# Altium PCB PCB1.PcbDoc
Units mm, origin at the board's own origin, x right, y up, seen from the top; angles counter-clockwise.
Board outline 55 x 60 mm, 4 copper layers (Top Layer, Layer 1, Layer 2, Bottom Layer), stack 1.448 mm thick; 5 components, 20 nets, 80 pads, 2 vias.
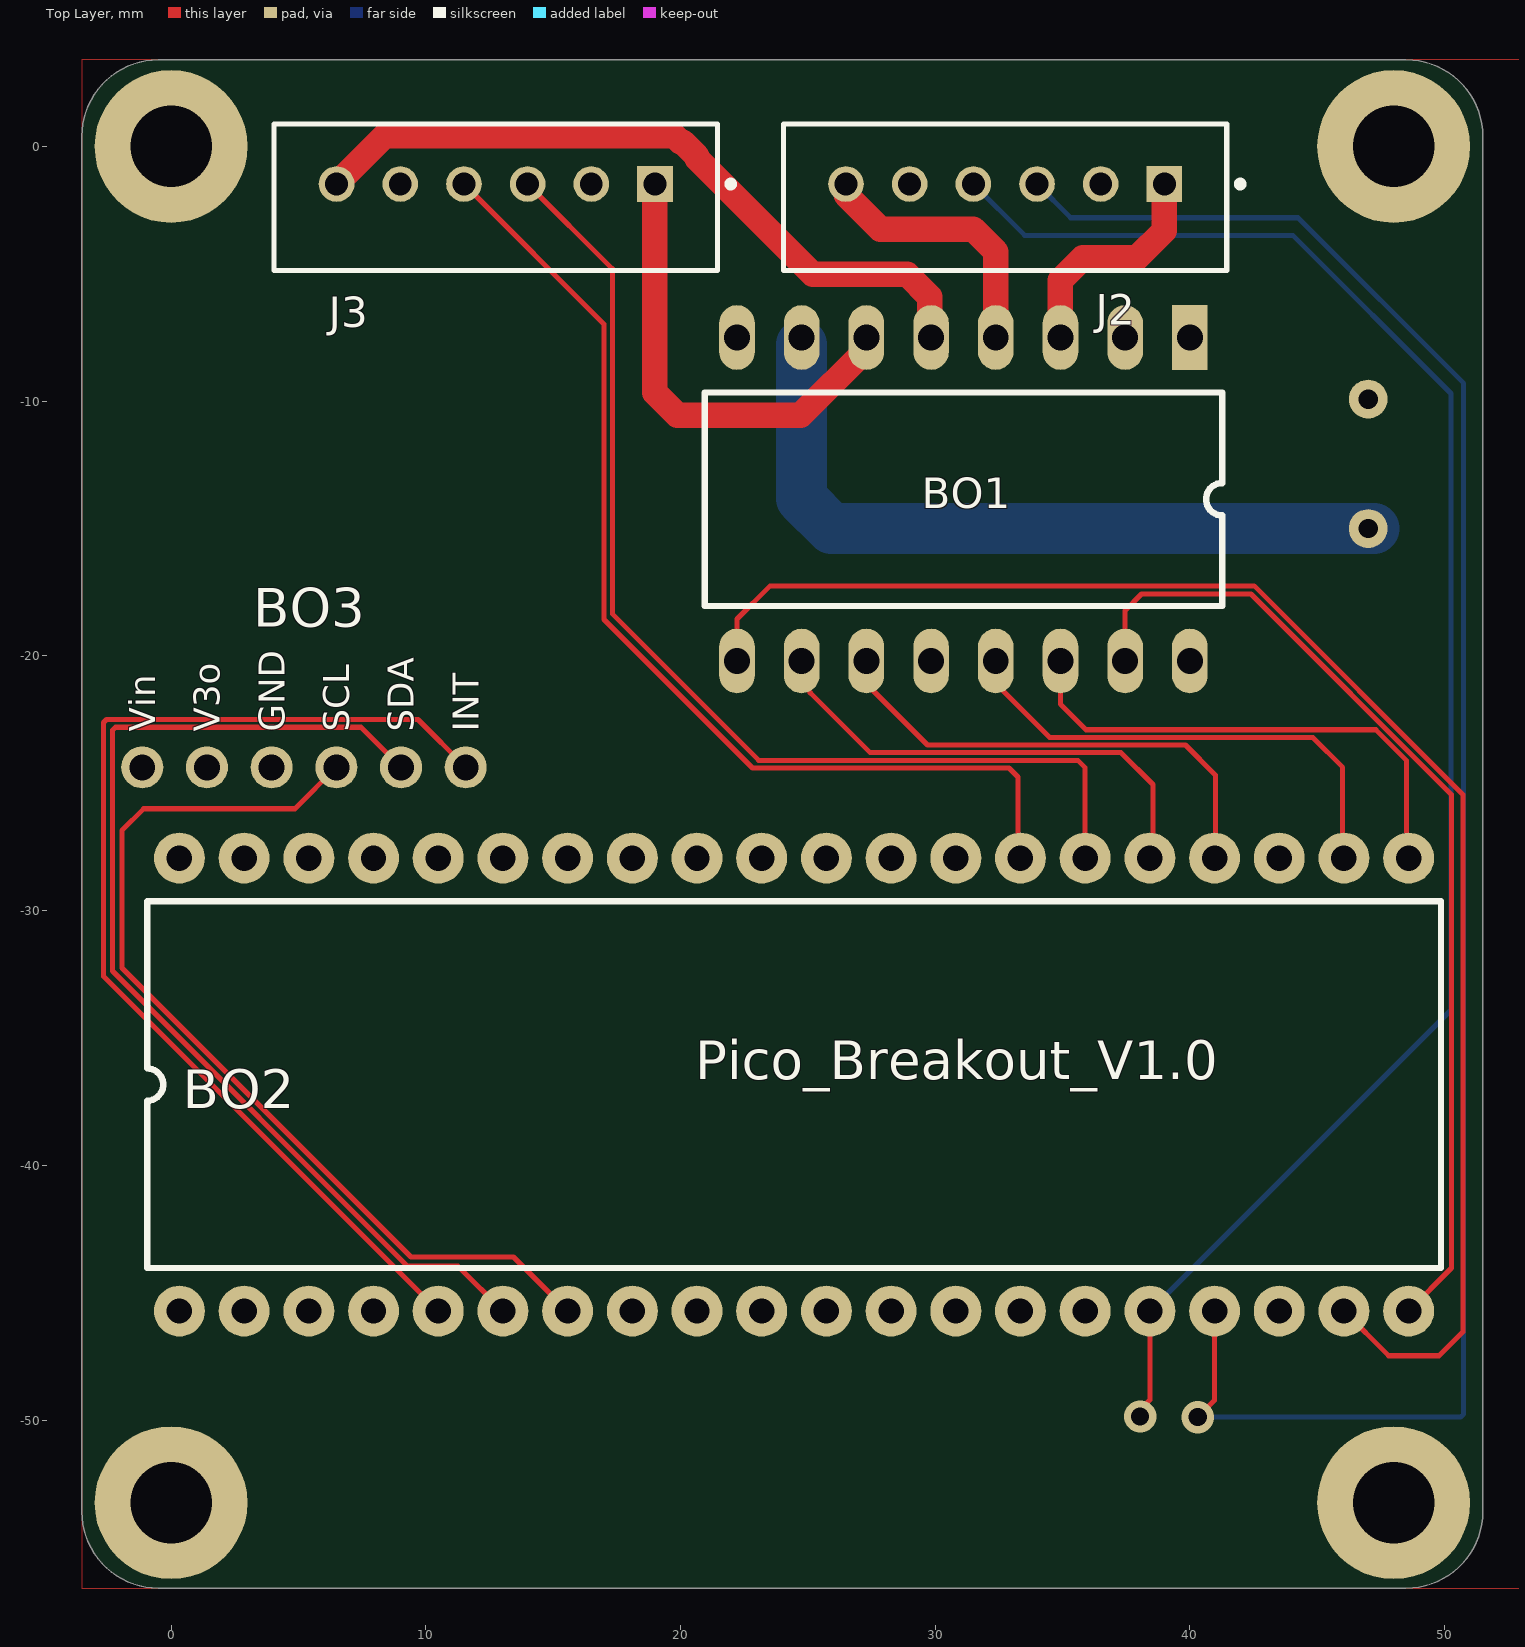
[diagram p0: Top Layer view]
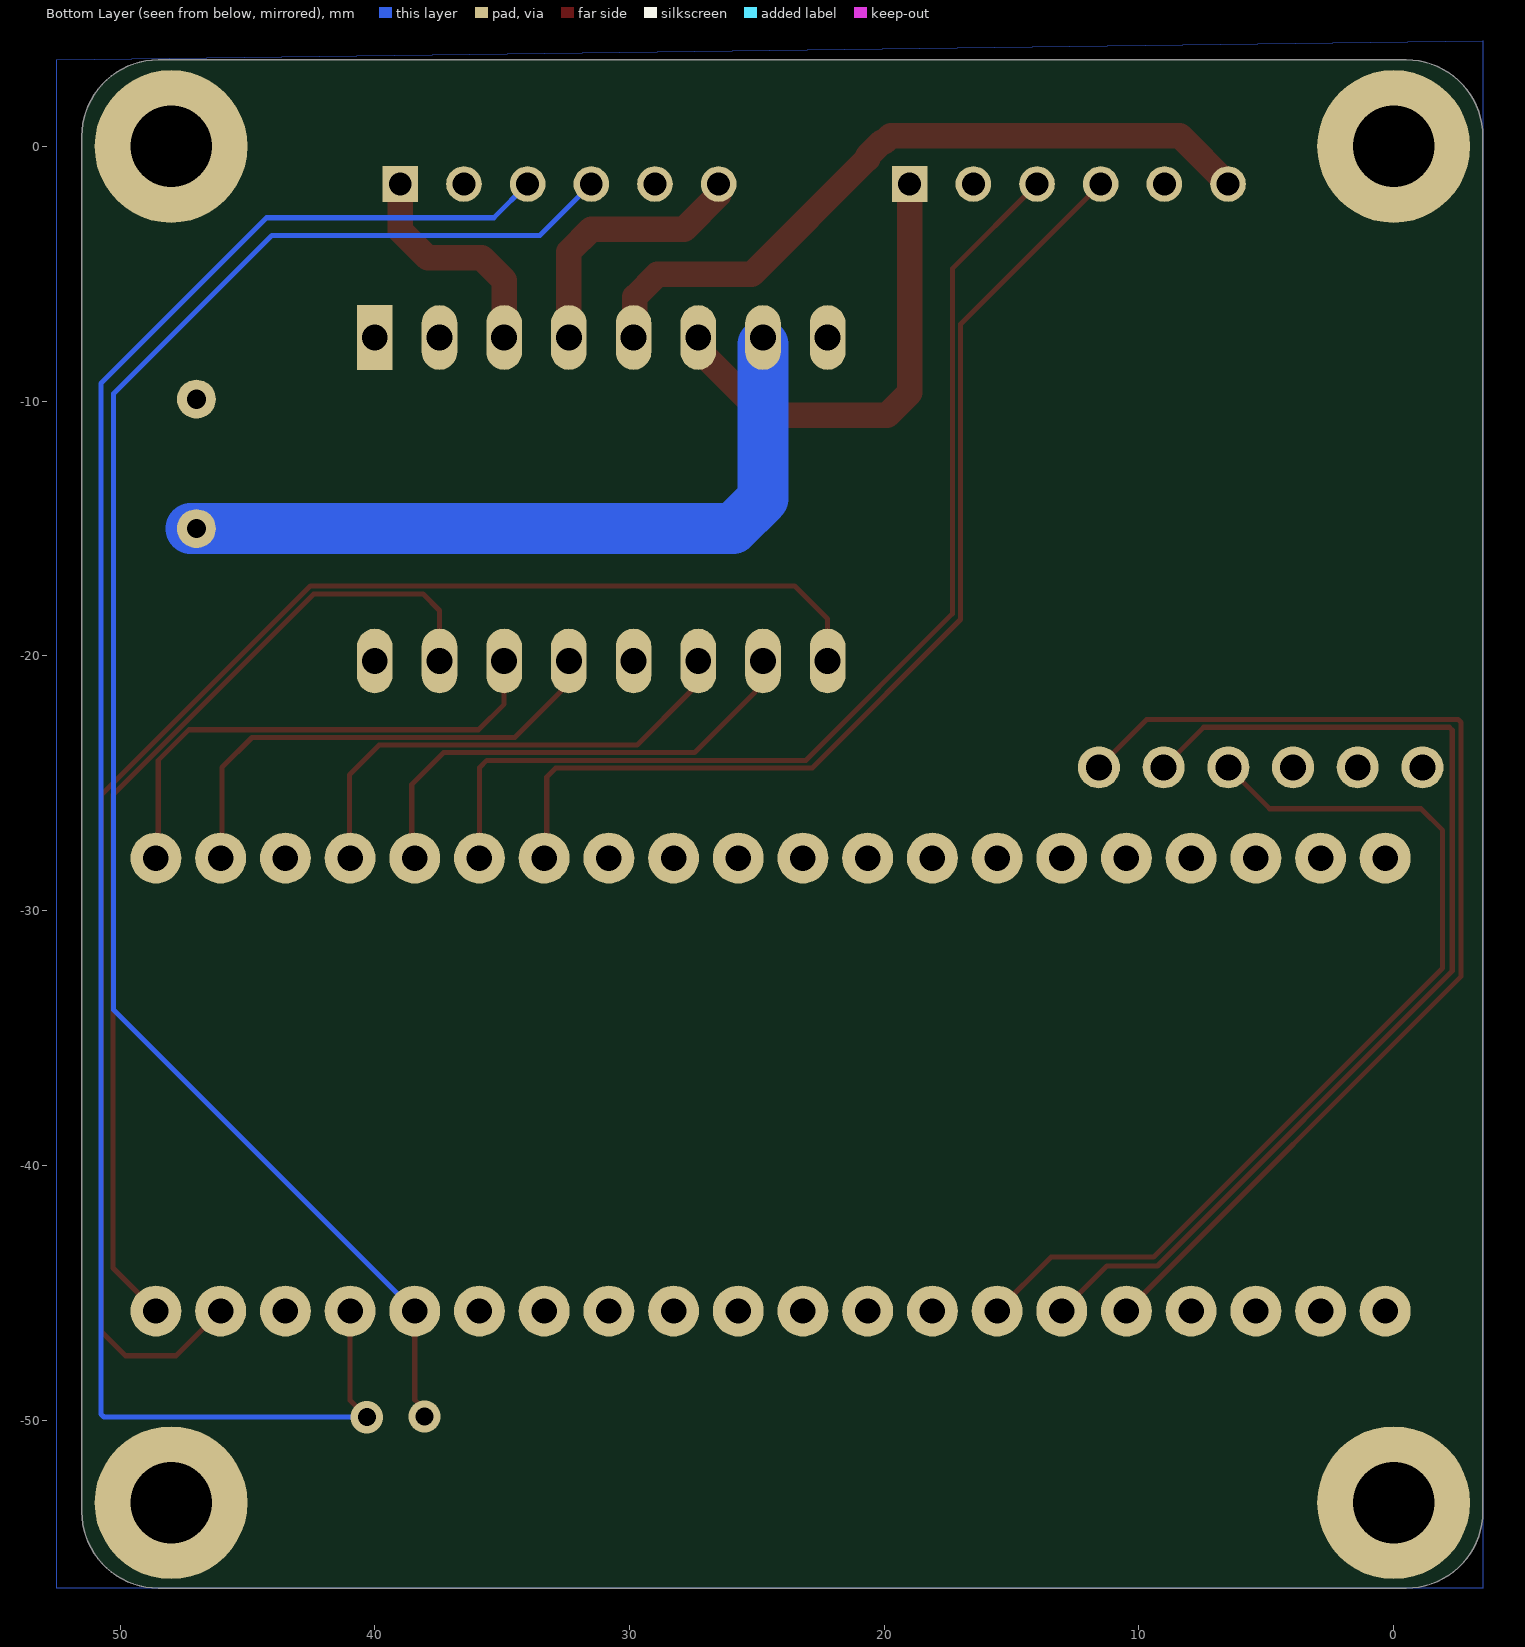
[diagram p1: Bottom Layer view, seen from below]

## Layer stack, top to bottom
Top Solder: solder mask 0.0102, Solder Resist, Dk 3.5
Top Layer: signal copper 0.0356
Dielectric 2: prepreg 0.0711, PP-006, Dk 4.1
Layer 1: signal copper 0.0175
Dielectric 1: dielectric 1.2, FR-4, Dk 4.8
Layer 2: signal copper 0.0175
Dielectric 3: prepreg 0.0711, PP-006, Dk 4.1
Bottom Layer: signal copper 0.0356
Bottom Solder: solder mask 0.0102, Solder Resist, Dk 3.5

## Board outline
-3.5,-53.6 -3.5,0.4 cw(c-0.5,0.4) -0.5,3.4 48.5,3.4 cw(c48.5,0.4) 51.5,0.4 51.5,-53.6 cw(c48.5,-53.6) 48.5,-56.6 -0.5,-56.6 cw(c-0.5,-53.6)

## Design rules (kind name [scope] priority, off if disabled: settings)
AssemblyTestPointUsage [All] p0: scope1count=1 scope1_0_kind=Board scope1_0_value=Board scope2count=1 scope2_0_kind=Board scope2_0_value=Board commentlength=0
AssemblyTestpoint [All] p0: scope1count=1 scope1_0_kind=Board scope1_0_value=Board scope2count=1 scope2_0_kind=Board scope2_0_value=Board commentlength=0
BoardOutlineClearance [All] p0: scope1count=1 scope1_0_kind=Board scope1_0_value=Board scope2count=1 scope2_0_kind=Board scope2_0_value=Board commentlength=0 gap=0.2
BoardOutlineClearance [All] p1: gap=0.2 ignorepadtopadclearanceinfootprint=FALSE
Clearance [All] p0: scope1count=1 scope1_0_kind=Board scope1_0_value=Board scope2count=1 scope2_0_kind=Board scope2_0_value=Board commentlength=0 gap=0.2
Clearance [All] p1: gap=0.2 ignorepadtopadclearanceinfootprint=TRUE except(0: Arc-Text Arc-Hole Track-Text Track-Hole SMDPad-Text SMDPad-Hole THPad-Text THPad-Hole Via-Text Via-Hole Fill-Text Fill-Hole Poly-Text Poly-Hole Region-Text Region-Hole Text-Text Text-Hole; 0.1: Arc-Arc Arc-Track Track-Track)
ComponentClearance [All] p0: scope1count=1 scope1_0_kind=Board scope1_0_value=Board scope2count=1 scope2_0_kind=Board scope2_0_value=Board commentlength=0 gap=0.254 collisioncheckmode=3
DiffPairsRouting [All] p0: scope1count=1 scope1_0_kind=Board scope1_0_value=Board scope2count=1 scope2_0_kind=Board scope2_0_value=Board commentlength=0
FabricationTestPointUsage [All] p0: scope1count=1 scope1_0_kind=Board scope1_0_value=Board scope2count=1 scope2_0_kind=Board scope2_0_value=Board commentlength=0 valid=0 allowmultiple=FALSE
FabricationTestpoint [All] p0: scope1count=1 scope1_0_kind=Board scope1_0_value=Board scope2count=1 scope2_0_kind=Board scope2_0_value=Board commentlength=0 side=3 testpointundercomponent=TRUE minsize=1.016 maxsize=2.54 preferedsize=1.524 minholesize=0 maxholesize=1.016 preferedholesize=0.813 testpointgrid=0.025
FanoutControl Fanout_Default [All] p0: scope1count=1 scope1_0_kind=Board scope1_0_value=Board scope2count=1 scope2_0_kind=Board scope2_0_value=Board commentlength=30 // Fanout_Default (Default Rule)
FanoutControl Fanout_Small [All] p0 off: scope1count=1 scope1_0_kind=Board scope1_0_value=Board scope2count=1 scope2_0_kind=Board scope2_0_value=Board commentlength=84 // Protel DXP Scope 1 Expression Was: (CompPinCount < 5)   Fanout_Small (Default Rule)
FanoutControl Fanout_SOIC [All] p0 off: scope1count=1 scope1_0_kind=Board scope1_0_value=Board scope2count=1 scope2_0_kind=Board scope2_0_value=Board commentlength=71 // Protel DXP Scope 1 Expression Was: IsSOIC   Fanout_SOIC (Default Rule)
FanoutControl Fanout_LCC [All] p0 off: scope1count=1 scope1_0_kind=Board scope1_0_value=Board scope2count=1 scope2_0_kind=Board scope2_0_value=Board commentlength=69 // Protel DXP Scope 1 Expression Was: IsLCC   Fanout_LCC (Default Rule)
FanoutControl Fanout_BGA [All] p0 off: scope1count=1 scope1_0_kind=Board scope1_0_value=Board scope2count=1 scope2_0_kind=Board scope2_0_value=Board commentlength=69 // Protel DXP Scope 1 Expression Was: IsBGA   Fanout_BGA (Default Rule)
Height [All] p0: scope1count=1 scope1_0_kind=Board scope1_0_value=Board scope2count=1 scope2_0_kind=Board scope2_0_value=Board commentlength=0
HoleSize [All] p0: scope1count=1 scope1_0_kind=Board scope1_0_value=Board scope2count=1 scope2_0_kind=Board scope2_0_value=Board commentlength=0 absolutevalues=TRUE maxlimit=6.3 minlimit=0.3 maxpercent=80.000 minpercent=20.000
HoleSize [All] p1: absolutevalues=TRUE maxlimit=6.3 minlimit=0.3 maxpercent=80.000 minpercent=20.000
HoleToHoleClearance [All] p0: scope1count=1 scope1_0_kind=Board scope1_0_value=Board scope2count=1 scope2_0_kind=Board scope2_0_value=Board commentlength=0
LayerPairs [All] p0: scope1count=1 scope1_0_kind=Board scope1_0_value=Board scope2count=1 scope2_0_kind=Board scope2_0_value=Board commentlength=0 enforce=TRUE
MinimumAnnularRing [All] p0: scope1count=1 scope1_0_kind=Board scope1_0_value=Board scope2count=1 scope2_0_kind=Board scope2_0_value=Board commentlength=0 minimumring=0.13
MinimumAnnularRing [All] p1: minimumring=0.13
MinimumSolderMaskSliver [All] p0: scope1count=1 scope1_0_kind=Board scope1_0_value=Board scope2count=1 scope2_0_kind=Board scope2_0_value=Board commentlength=0
MinimumSolderMaskSliver [All] p1: minsoldermaskwidth=0.098
NetAntennae [All] p0: scope1count=1 scope1_0_kind=Board scope1_0_value=Board scope2count=1 scope2_0_kind=Board scope2_0_value=Board commentlength=0
PasteMaskExpansion [All] p0: scope1count=1 scope1_0_kind=Board scope1_0_value=Board scope2count=1 scope2_0_kind=Board scope2_0_value=Board commentlength=0 expansion=0
PlaneClearance [All] p0: scope1count=1 scope1_0_kind=Board scope1_0_value=Board scope2count=1 scope2_0_kind=Board scope2_0_value=Board commentlength=0 clearance=0.508
PlaneConnect [All] p0: scope1count=1 scope1_0_kind=Board scope1_0_value=Board scope2count=1 scope2_0_kind=Board scope2_0_value=Board commentlength=0 planeconnectstyle=Relief reliefexpansion=0.508 reliefentries=4 reliefconductorwidth=0.254 reliefairgap=0.254
PolygonConnect [All] p0: scope1count=1 scope1_0_kind=Board scope1_0_value=Board scope2count=1 scope2_0_kind=Board scope2_0_value=Board commentlength=0 connectstyle=Relief reliefconductorwidth=0.3 reliefentries=4 polygonreliefangle="90 Angle"
PolygonConnect "PTH-M3 Connect" [All] p0: scope1count=1 scope1_0_kind=Board scope1_0_value=Board scope2count=1 scope2_0_kind=Footprint scope2_0_value=PTH-M3 commentlength=0 connectstyle=Direct reliefconductorwidth=0.254 reliefentries=4 polygonreliefangle="90 Angle"
PolygonConnect "PTH-M3 Connect" [All vs HasFootprint('PTH-M3')] p1: connectstyle=Direct reliefconductorwidth=0.254 reliefentries=4 polygonreliefangle="90 Angle" airgapwidth=0.254
PolygonConnect [All] p2: thpad.connectstyle=Relief thpad.reliefconductorwidth=0.3 thpad.reliefentries=4 thpad.polygonreliefangle="90 Angle" thpad.airgapwidth=0.1 smdpad.connectstyle=Relief smdpad.reliefconductorwidth=0.3 smdpad.reliefentries=4 smdpad.polygonreliefangle="90 Angle" smdpad.airgapwidth=0.1 via.connectstyle=Direct via.reliefconductorwidth=0.254 via.reliefentries=4 via.polygonreliefangle="90 Angle" via.airgapwidth=0.254
RoomDefinition Schemeatic_1_0 [All] p0: scope1count=1 scope1_0_kind=ComponentClass scope1_0_value=Schemeatic_1_0 scope2count=1 scope2_0_kind=Board scope2_0_value=Board commentlength=0 region_x1=0 region_y1=0 region_x2=20000000 region_y2=10000000 confinementstyle=ConfineOut
RoomDefinition Schemeatic_1_0 [InComponentClass('Schemeatic_1_0')] p1: confinementstyle=ConfineOut formatcopy=TRUE lockcomponents=FALSE outline -99.949,-99.949 -49.149,-99.949 -49.149,-74.549 -99.949,-74.549
RoutingCorners [All] p0: scope1count=1 scope1_0_kind=Board scope1_0_value=Board scope2count=1 scope2_0_kind=Board scope2_0_value=Board commentlength=0 cornerstyle=45-Degree minsetback=2.54 maxsetback=2.54
RoutingLayers [All] p0: scope1count=1 scope1_0_kind=Board scope1_0_value=Board scope2count=1 scope2_0_kind=Board scope2_0_value=Board commentlength=0 top layer=Automatic mid layer 1=Automatic mid layer 2=Automatic bottom layer=Automatic
RoutingPriority [All] p0: scope1count=1 scope1_0_kind=Board scope1_0_value=Board scope2count=1 scope2_0_kind=Board scope2_0_value=Board commentlength=0
RoutingTopology [All] p0: scope1count=1 scope1_0_kind=Board scope1_0_value=Board scope2count=1 scope2_0_kind=Board scope2_0_value=Board commentlength=0 topology=Shortest
RoutingVias [All] p0: scope1count=1 scope1_0_kind=Board scope1_0_value=Board scope2count=1 scope2_0_kind=Board scope2_0_value=Board commentlength=0 holewidth=0.3 width=0.6 viastyle="Through Hole" minholewidth=0.3 minwidth=0.45 maxholewidth=6.35 maxwidth=3
RoutingVias [All] p1: holewidth=0.3 width=0.6 viastyle="Through Hole" minholewidth=0.3 minwidth=0.45 maxholewidth=6.35 maxwidth=3
ShortCircuit [All] p0: scope1count=1 scope1_0_kind=Board scope1_0_value=Board scope2count=1 scope2_0_kind=Board scope2_0_value=Board commentlength=0 allowed=FALSE
SilkToBoardRegionClearance [All] p0: scope1count=1 scope1_0_kind=Board scope1_0_value=Board scope2count=1 scope2_0_kind=Board scope2_0_value=Board commentlength=0
SilkToSilkClearance [All] p0: scope1count=1 scope1_0_kind=Board scope1_0_value=Board scope2count=1 scope2_0_kind=Board scope2_0_value=Board commentlength=0
SilkToSilkClearance [All] p1: silktosilkclearance=0.1
SilkToSolderMaskClearance [All] p0 off: scope1count=1 scope1_0_kind=Board scope1_0_value=Board scope2count=1 scope2_0_kind=Board scope2_0_value=Board commentlength=44 // Protel DXP Scope 1 Expression Was: IsPad
SilkToSolderMaskClearance [IsPad] p1: minsilkscreentomaskgap=0 clearancetoexposedcopper=TRUE
SolderMaskExpansion [All] p0: scope1count=1 scope1_0_kind=Board scope1_0_value=Board scope2count=1 scope2_0_kind=Board scope2_0_value=Board commentlength=0 expansion=0.038
SolderMaskExpansion "Tent Vias" [All] p0 off: scope1count=1 scope1_0_kind=Board scope1_0_value=Board scope2count=1 scope2_0_kind=Board scope2_0_value=Board commentlength=44 expansion=0.102 // Protel DXP Scope 1 Expression Was: IsVia
SolderMaskExpansion "Tent Vias" [IsVia] p1: expansion=0.102 istentingtop=TRUE
SolderMaskExpansion [All] p2: expansion=0.038 istentingtop=FALSE
UnRoutedNet [All] p0: scope1count=1 scope1_0_kind=Board scope1_0_value=Board scope2count=1 scope2_0_kind=Board scope2_0_value=Board commentlength=0
UnpouredPolygon [All] p0: scope1count=1 scope1_0_kind=Board scope1_0_value=Board scope2count=1 scope2_0_kind=Board scope2_0_value=Board commentlength=0
Width [All] p0: scope1count=1 scope1_0_kind=Board scope1_0_value=Board scope2count=1 scope2_0_kind=Board scope2_0_value=Board commentlength=0 maxlimit=2 minlimit=0.1 preferedwidth=0.2
Width PowerNets [All] p0: scope1count=1 scope1_0_kind=NetClass scope1_0_value=PowerNets scope2count=1 scope2_0_kind=Board scope2_0_value=Board commentlength=0 maxlimit=0.5 minlimit=0.2 preferedwidth=0.2
Width PowerNets [InNetClass('PowerNets')] p1: maxlimit=0.5 minlimit=0.2 preferedwidth=0.2 minimp=50.000000 maximp=50.000000 favimp=50.000000
Width [All] p2: maxlimit=2 minlimit=0.1 preferedwidth=0.2 minimp=50.000000 maximp=50.000000 favimp=50.000000
26 further rules are at their usual default settings.

## Components (designator, comment, footprint, x,y, rotation, side; value= is the part's Value field where it differs from the comment)
BO1 "" "DIP16 - duplicate1" 40,-7.5 r270 top
BO2 "Pico Custom" DIP40 0.33,-45.72 r90 top
BO3 "I2C breakout for MPU6050" PCBComponent_1 -1.13,-24.375 r90 top
J2 "B6B-XH-A(LF)(SN)" FP-B6B-XH-A_LF_SN-MFG 32.75,-2 r180 top
J3 "B6B-XH-A(LF)(SN)" FP-B6B-XH-A_LF_SN-MFG 12.75,-2 r180 top

## Footprints (in the part's own frame and the unit in brackets; to place one, negate y for a bottom-side part, rotate by r counter-clockwise, add the part's x,y. Pads: shape width x height; smd on the part's side, far side on the other; paste and mask are expansions set on the pad)
"DIP16 - duplicate1" [mil]
  rect 100x55 hole 40: 1(0,0)
  oval 100x55 hole 40: 2(0,-100) 3(0,-200) 4(0,-300) 5(0,-400) 6(0,-500) 7(0,-600) 8(0,-700) 9(500,-700) 10(500,-600) 11(500,-500) 12(500,-400) 13(500,-300) 14(500,-200) 15(500,-100) 16(500,0)
  silkscreen extent 85,-750 415,50
DIP40 [mm]
  round 2 hole 1: 1(0,0) 2(0,-2.54) 3(0,-5.08) 4(0,-7.62) 5(0,-10.16) 6(0,-12.7) 7(0,-15.24) 8(0,-17.78) 9(0,-20.32) 10(0,-22.86) 11(0,-25.4) 12(0,-27.94) 13(0,-30.48) 14(0,-33.02) 15(0,-35.56) 16(0,-38.1) 17(0,-40.64) 18(0,-43.18) 19(0,-45.72) 20(0,-48.26) 21(17.78,-48.26) 22(17.78,-45.72) 23(17.78,-43.18) 24(17.78,-40.64) 25(17.78,-38.1) 26(17.78,-35.56) 27(17.78,-33.02) 28(17.78,-30.48) 29(17.78,-27.94) 30(17.78,-25.4) 31(17.78,-22.86) 32(17.78,-20.32) 33(17.78,-17.78) 34(17.78,-15.24) 35(17.78,-12.7) 36(17.78,-10.16) 37(17.78,-7.62) 38(17.78,-5.08) 39(17.78,-2.54) 40(17.78,0)
  silkscreen extent 1.69,-49.53 16.09,1.27
FP-B6B-XH-A_LF_SN-MFG [mm]
  rect 1.4x1.4 hole 0.9 paste-1000 mask+0: 1(-6.25,-0.525)
  round 1.4 hole 0.9 paste-1000 mask+0: 2(-3.75,-0.525) 3(-1.25,-0.525) 4(1.25,-0.525) 5(3.75,-0.525) 6(6.25,-0.525)
  silkscreen extent -9.35,-2.88 8.7,2.88
PCBComponent_1 [mil]
  round 65 hole 40: 0(0,0) 1(0,-100) 2(0,-200) 3(0,-300) 4(0,-400) 5(0,-500)

## Part data
BO1: library part TB6612FNG_Breakout
BO2: library part PIco_custom_BO
BO3: library part MPU_6050_IMU_I2C
J2 J3: library part CMP-17439-000076-1, "CONN HEADER VERT 6POS 2.5MM"

## Free pads (board coordinates)
  round 1.524 hole 0.762: 2(47,-15) 3(47,-9.92)
  round 6 hole 3.2: 8(0,-53.25) 11(48,-53.25) 12(48,0) 13(0,0)

## Via types
v1: diameter 1.27, hole 0.711, Top Layer to Bottom Layer, tented both sides, 2 vias

## Nets (pads, with @x,y where several pads share a name; then routed paths per layer and width w, separated by ;. In a path a pad name is that pad's centre, name@x,y a point inside that pad or via, vN(x,y) a via of type N, cw(c..) or ccw(c..) an arc to the next point about the centre after c; other vN are vias at no path point)
+5V: BO1.2 BO1.12 BO2.36 BO3.0 J2.5 J3.5 pad.3
+12: BO1.7 pad.2 | length 29
  Bottom Layer w2: BO1.7@24.76,-7.77 24.76,-13.828 25.932,-15 pad.2@47.225,-15
A01: BO1.3 J2.1 | length 9
  Top Layer w1: BO1.3 34.92,-5.251 35.799,-4.372 37.928,-4.372 39,-3.3 J2.1
A02: BO1.4 J2.6 | length 10.6
  Top Layer w1: J2.6 26.5,-1.897 27.853,-3.25 31.501,-3.25 32.38,-4.129 BO1.4
AIN1: BO1.11 BO2.24 | length 18.4
  Top Layer w0.2: BO1.11 27.3,-21.095 27.642,-21.437 27.642,-21.442 29.7,-23.5 39.825,-23.5 41,-24.675 BO2.24@41,-26.961
AIN2: BO1.10 BO2.25 | length 18.3
  Top Layer w0.2: BO1.10 24.76,-21.095 25.097,-21.432 25.097,-21.447 27.45,-23.8 37.3,-23.8 38.55,-25.05 BO2.25@38.55,-26.997
B01: BO1.6 J3.1 | length 18.4
  Top Layer w1: J3.1 19,-9.671 19.879,-10.55 24.719,-10.55 27.3,-7.968 BO1.6
B02: BO1.5 J3.6 | length 28.4
  Top Layer w1: J3.6 8.4,0.425 19.75,0.425 20,0.175 20.094,0.175 20.65,-0.381 20.65,-0.475 25.2,-5.025 28.91,-5.025 29.788,-5.904 29.788,-7.448 BO1.5
BIN1: BO1.13 BO2.22 | length 19.5
  Top Layer w0.2: BO1.13 32.38,-21.08 34.5,-23.2 44.825,-23.2 46,-24.375 46,-27.89 BO2.22
BIN2: BO1.14 BO2.21 | length 19
  Top Layer w0.2: BO1.14 34.92,-21.895 35.925,-22.9 47.3,-22.9 48.5,-24.1 48.5,-26.928
GND: BO1.1 BO1.8 BO1.16 BO2.38 BO3.2 J2.2 J3.2
MA1: BO2.16 J2.4 | length 67.7
  Top Layer w0.2: J2.4@31.27,-1.705 J2.4 ; v1(38.049,-49.86) 38.049,-49.589 38.43,-49.208 BO2.16
  Bottom Layer w0.2: J2.4 33.515,-3.49 44.04,-3.49 50.25,-9.7 50.25,-33.9 BO2.16
MA2: BO2.27 J3.4 | length 41.6
  Top Layer w0.2: J3.4 17,-6.975 17,-18.575 22.825,-24.4 32.9,-24.4 33.25,-24.75 33.25,-27.642 BO2.27@33.599,-27.991
MB1: BO2.17 J2.3 | length 75.4
  Top Layer w0.2: v1(40.31,-49.886) 40.97,-49.225 BO2.17
  Bottom Layer w0.2: J2.3 35.325,-2.8 44.25,-2.8 50.75,-9.3 50.75,-49.768 50.633,-49.886 v1(40.31,-49.886)
MB2: BO2.26 J3.3 | length 42.9
  Top Layer w0.2: J3.3 17.325,-4.8 17.325,-18.35 23.075,-24.1 35.6,-24.1 35.89,-24.39 BO2.26
NetBO2_5: BO2.5 BO3.5 | length 43.6
  Top Layer w0.2: BO2.5 -2.65,-32.58 -2.65,-22.617 -2.533,-22.5 9.695,-22.5 BO3.5
NetBO2_6: BO2.6 BO3.4 | length 42.3
  Top Layer w0.2: BO3.4 7.455,-22.8 -2.183,-22.8 -2.3,-22.917 -2.3,-32.375 9.275,-43.95 11.26,-43.95 BO2.6
NetBO2_7: BO2.7 BO3.3 | length 37.9
  Top Layer w0.2: BO3.3 4.865,-26 -1.075,-26 -1.925,-26.85 -1.925,-32.25 9.421,-43.596 13.447,-43.596 BO2.7
PWMA: BO1.9 BO2.19 | length 61
  Top Layer w0.2: BO1.9 22.22,-18.555 23.525,-17.25 42.525,-17.25 50.725,-25.45 50.725,-46.533 49.783,-47.475 47.805,-47.475 BO2.19
PWMB: BO1.15 BO2.20 | length 39.3
  Top Layer w0.2: BO1.15 37.46,-18.215 38.1,-17.575 42.399,-17.575 50.275,-25.451 50.275,-44.035 BO2.20
pads on no net: BO2.1 BO2.2 BO2.3 BO2.4 BO2.8 BO2.9 BO2.10 BO2.11 BO2.12 BO2.13 BO2.14 BO2.15 BO2.18 BO2.23 BO2.28 BO2.29 BO2.30 BO2.31 BO2.32 BO2.33 BO2.34 BO2.35 BO2.37 BO2.39 BO2.40 BO3.1

## Polygon pours and split planes (outlines as drawn)
GND on Bottom Layer "GND_L04_P001" (solid, pour order 1): -3.5,4.149 -3.5,-56.6 52.476,-56.6 52.476,-47.422 52.476,3.4
+5V on Top Layer "+5V_L01_P000" (solid, remove dead copper, pour order 0): -3.5,3.4 -3.5,-56.6 53.74,-56.6 53.74,3.4

## Silkscreen, mask and mechanical layers (free items; w line width, h text height)
Top Overlay:
  text "Pico_Breakout_V1.0" at 20.579,-36.617 h1.52
Mechanical 1:
  the board outline again, w0.254

## Text inside footprints (layer, text, board x,y; h text height)
BO3: Top Overlay "INT" at 12.078,-22.978 h1.02 r90; Top Overlay "V3o" at 1.918,-22.978 h1.02 r90; Top Overlay "SCL" at 6.998,-22.978 h1.02 r90; Top Overlay "GND" at 4.458,-22.978 h1.02 r90; Top Overlay "SDA" at 9.538,-22.978 h1.02 r90; Top Overlay "Vin" at -0.622,-22.978 h1.02 r90
J2: Top 3D Body "TB6612FNG Dual Motor Driver Carrier" at 18.55,-6.395 h1.52 r270